# Altium PCB Toygether_PCB.PcbDoc (part 1 of 2)
Units mm, origin at the board's own origin, x right, y up, seen from the top; angles counter-clockwise.
Board outline 55 x 58.13 mm, 4 copper layers (Top Layer, Signal Layer 1, Signal Layer 2, Bottom Layer), stack 0.778 mm thick; 93 components, 74 nets, 341 pads, 140 vias.
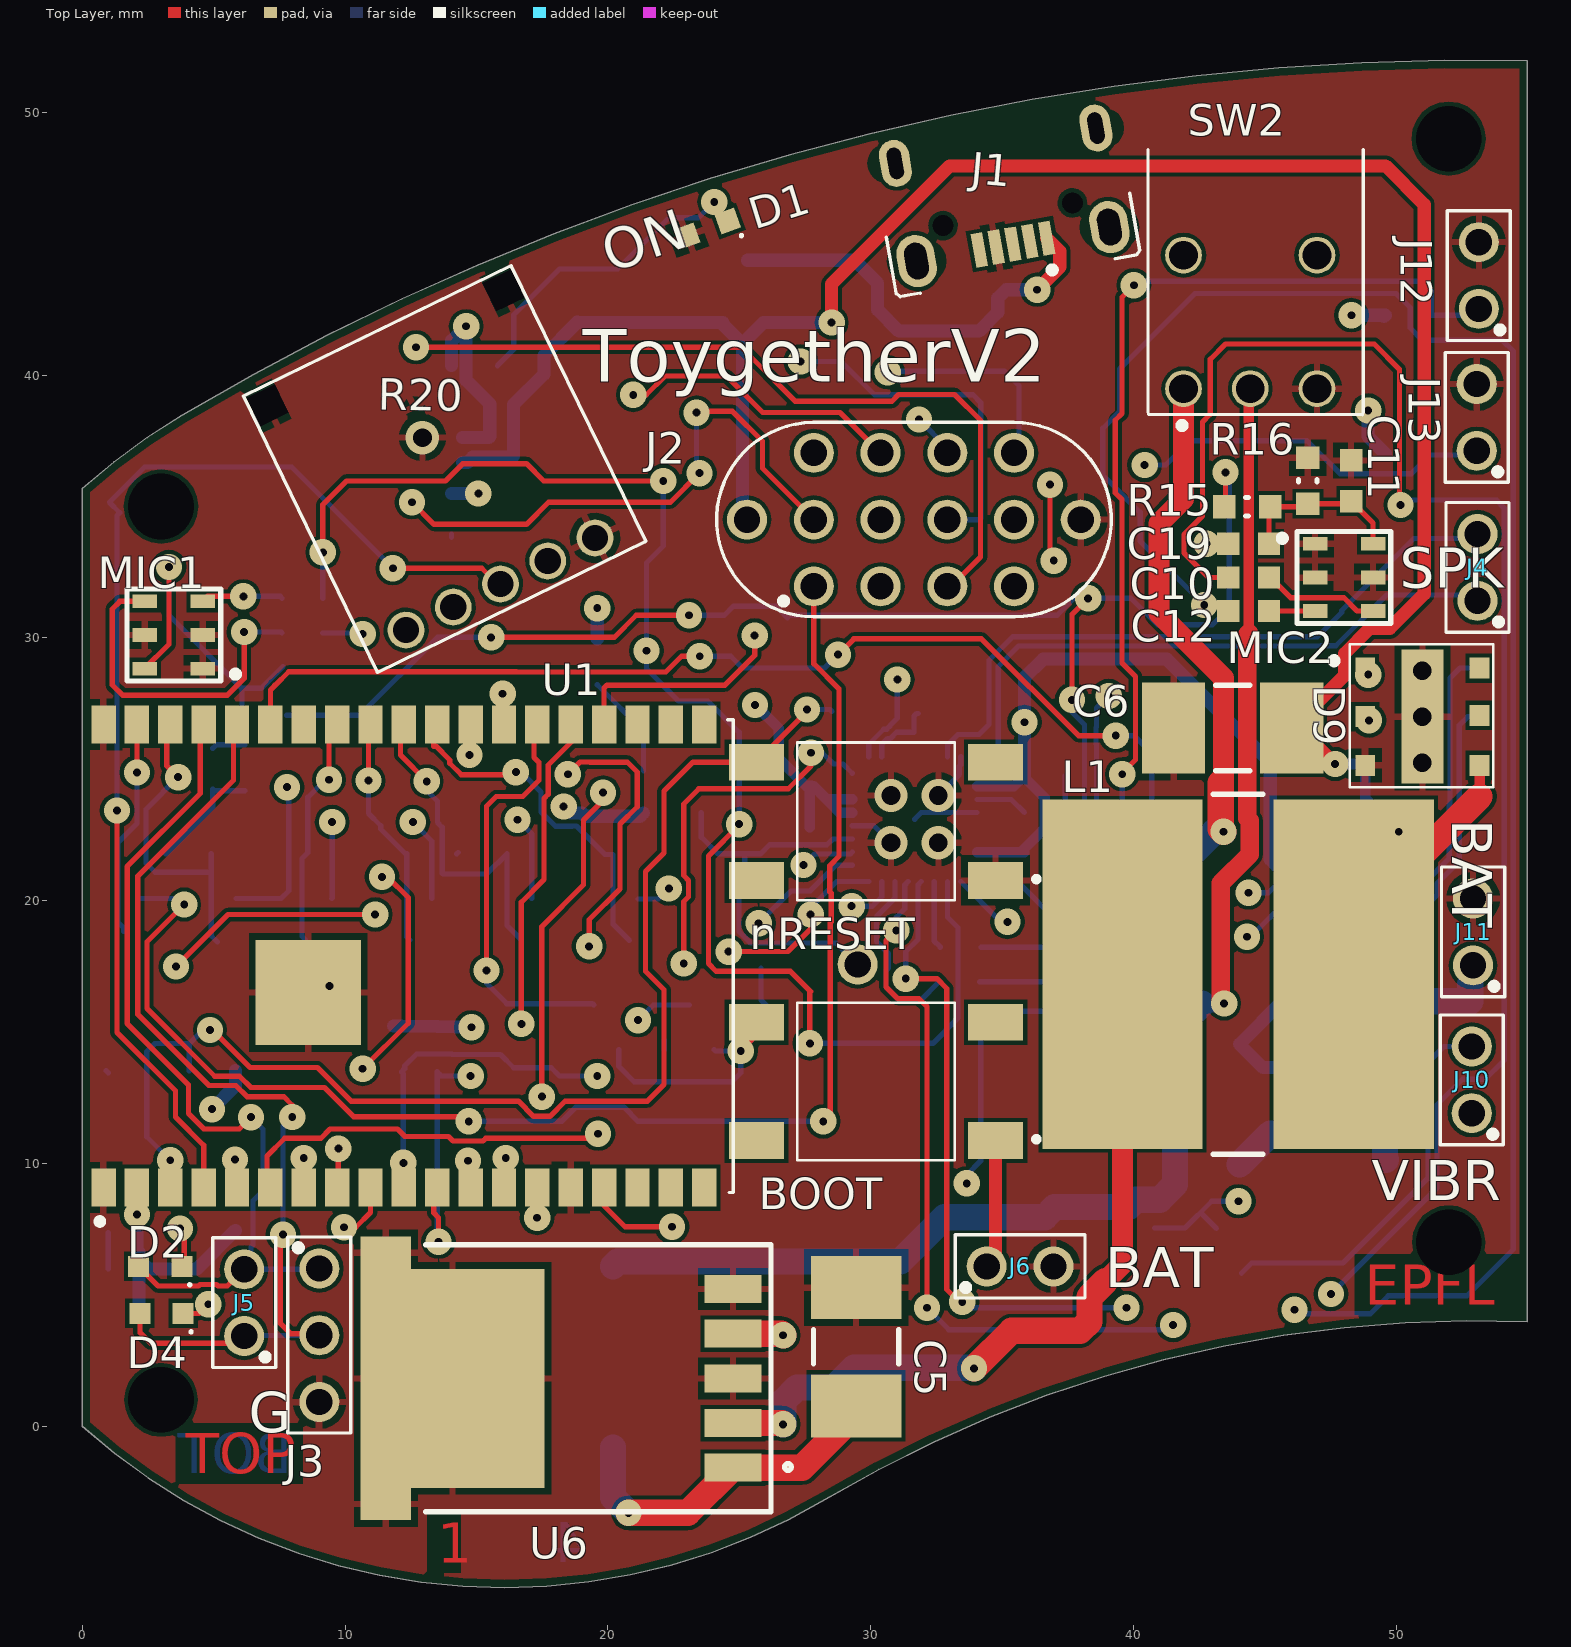
[diagram p0: Top Layer view]
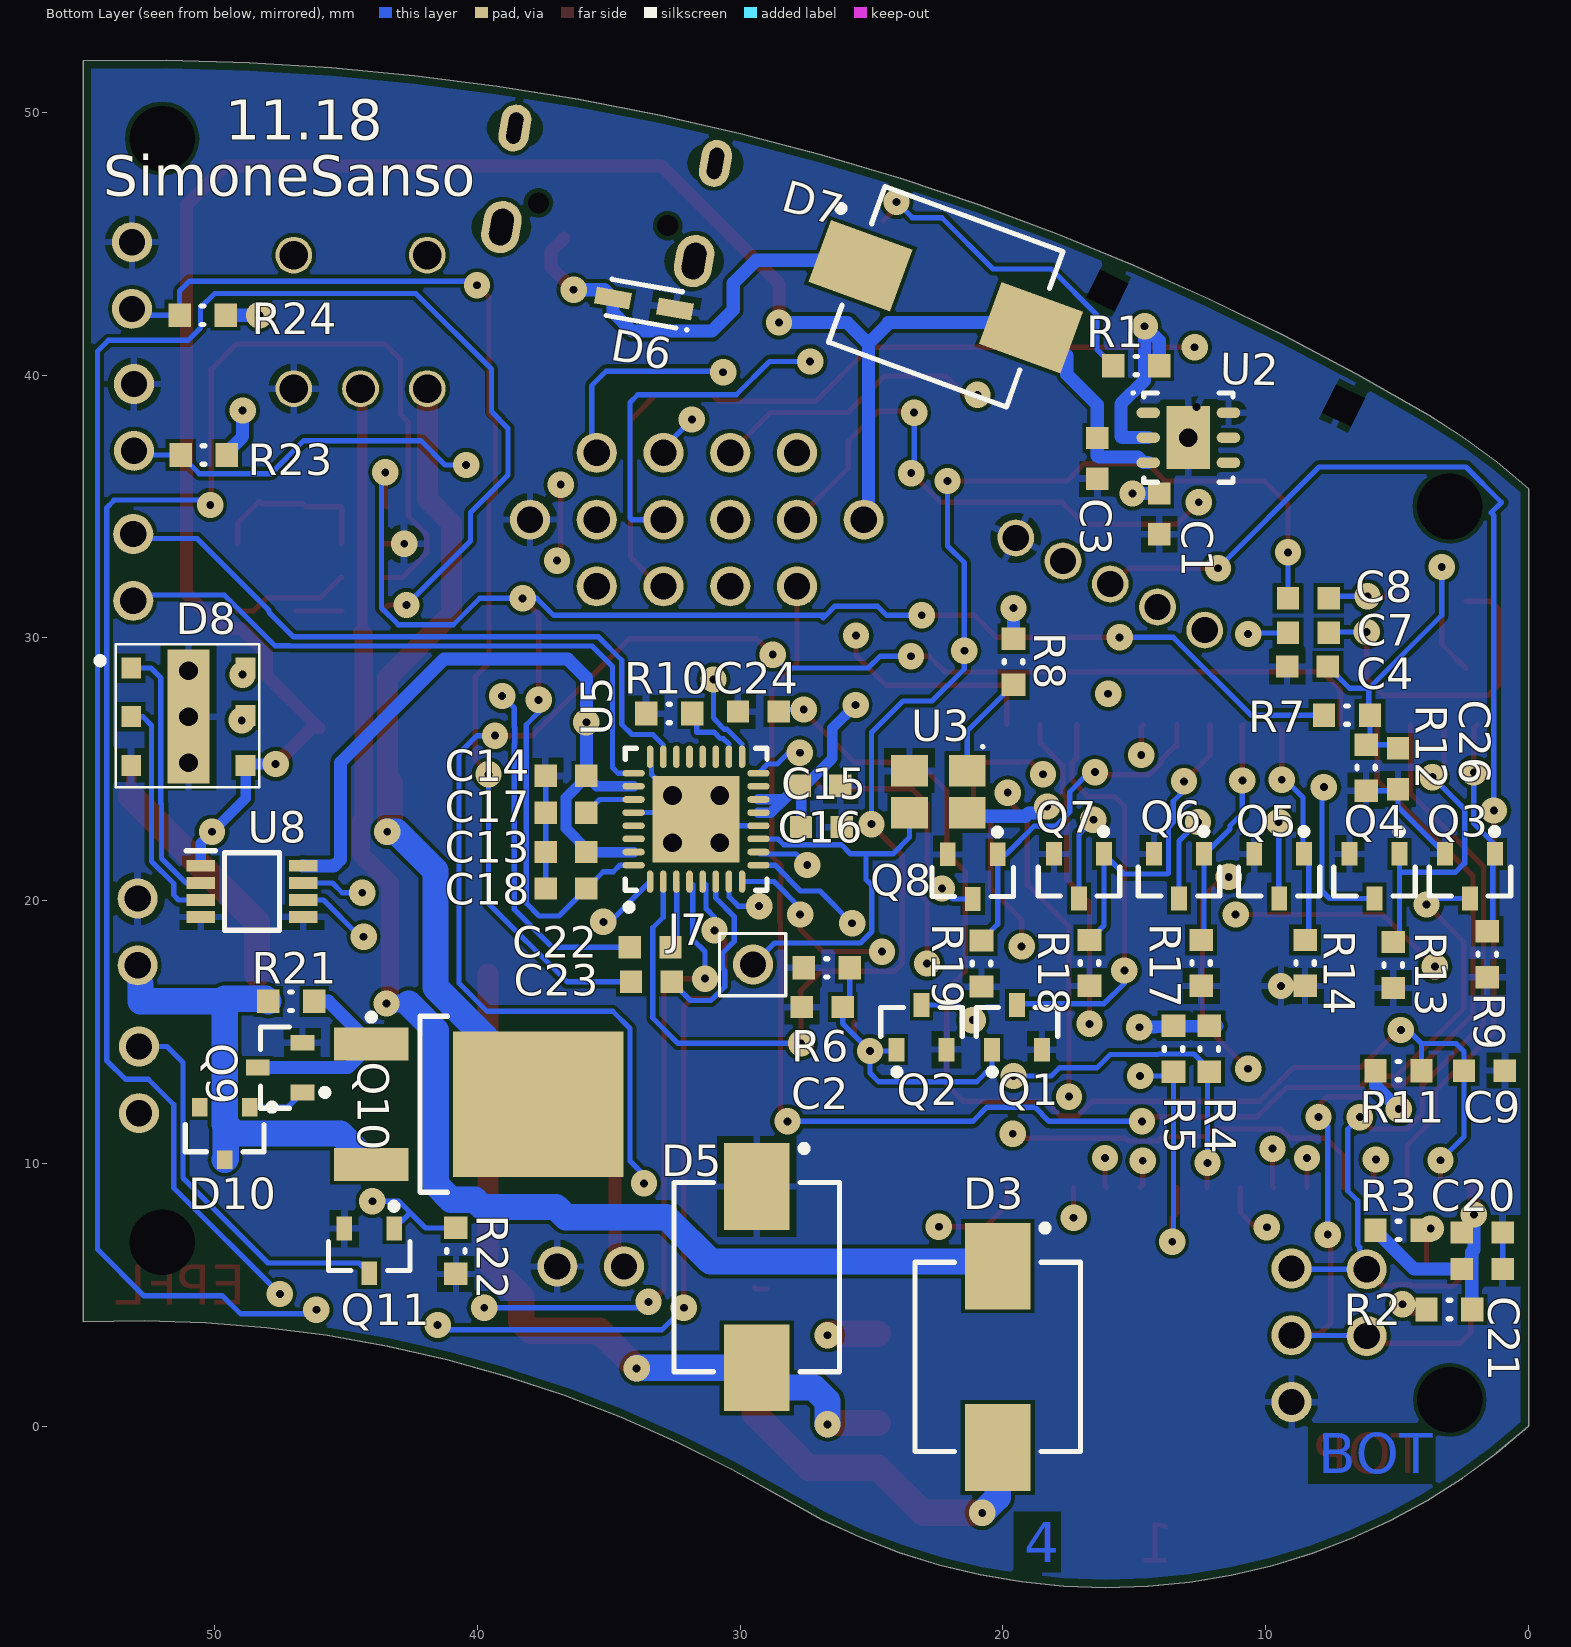
[diagram p1: Bottom Layer view, seen from below]
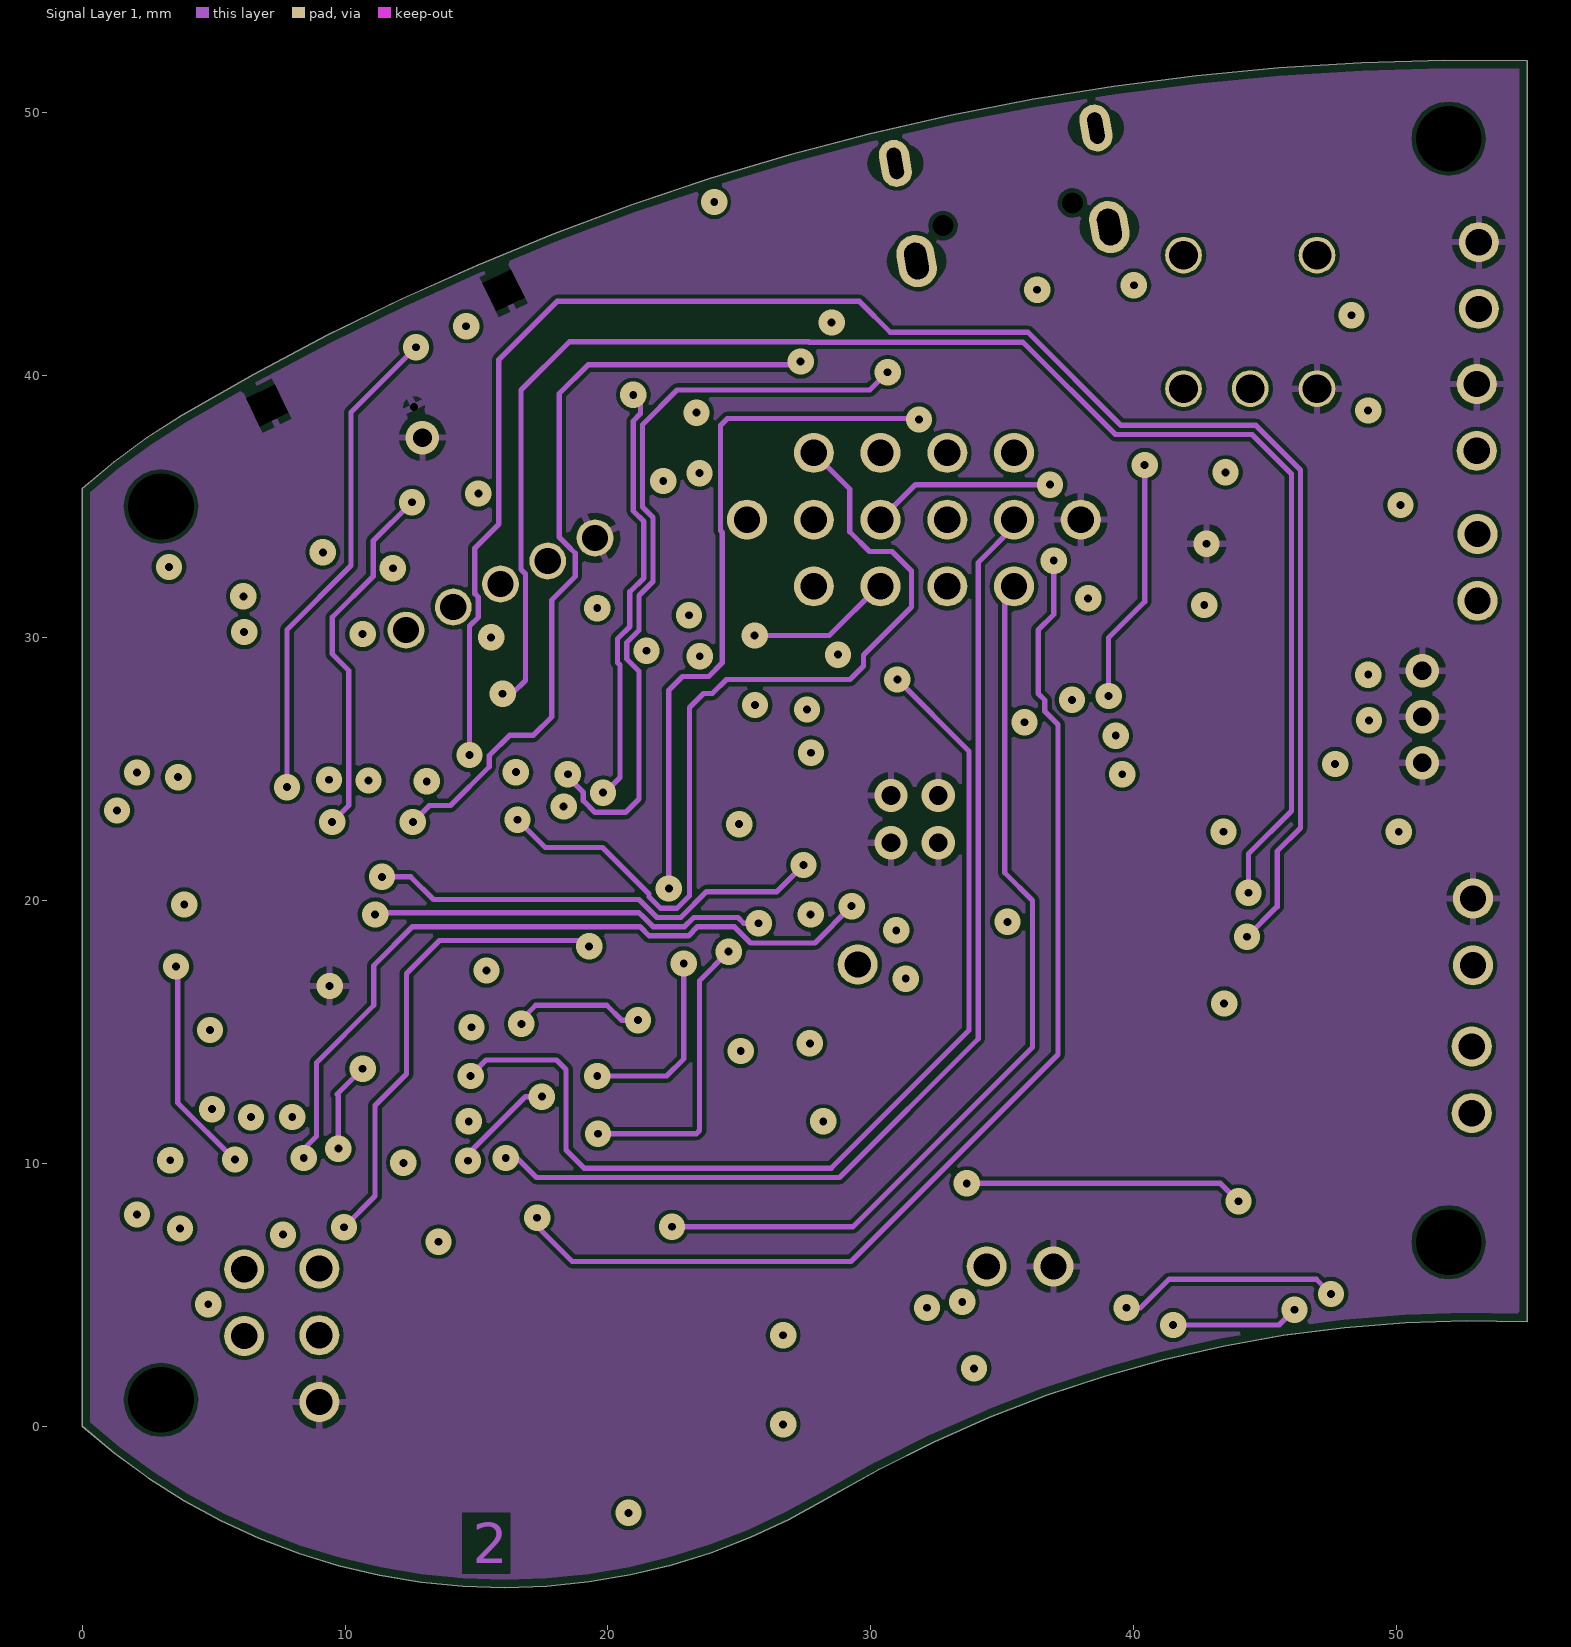
[diagram p2: Signal Layer 1]
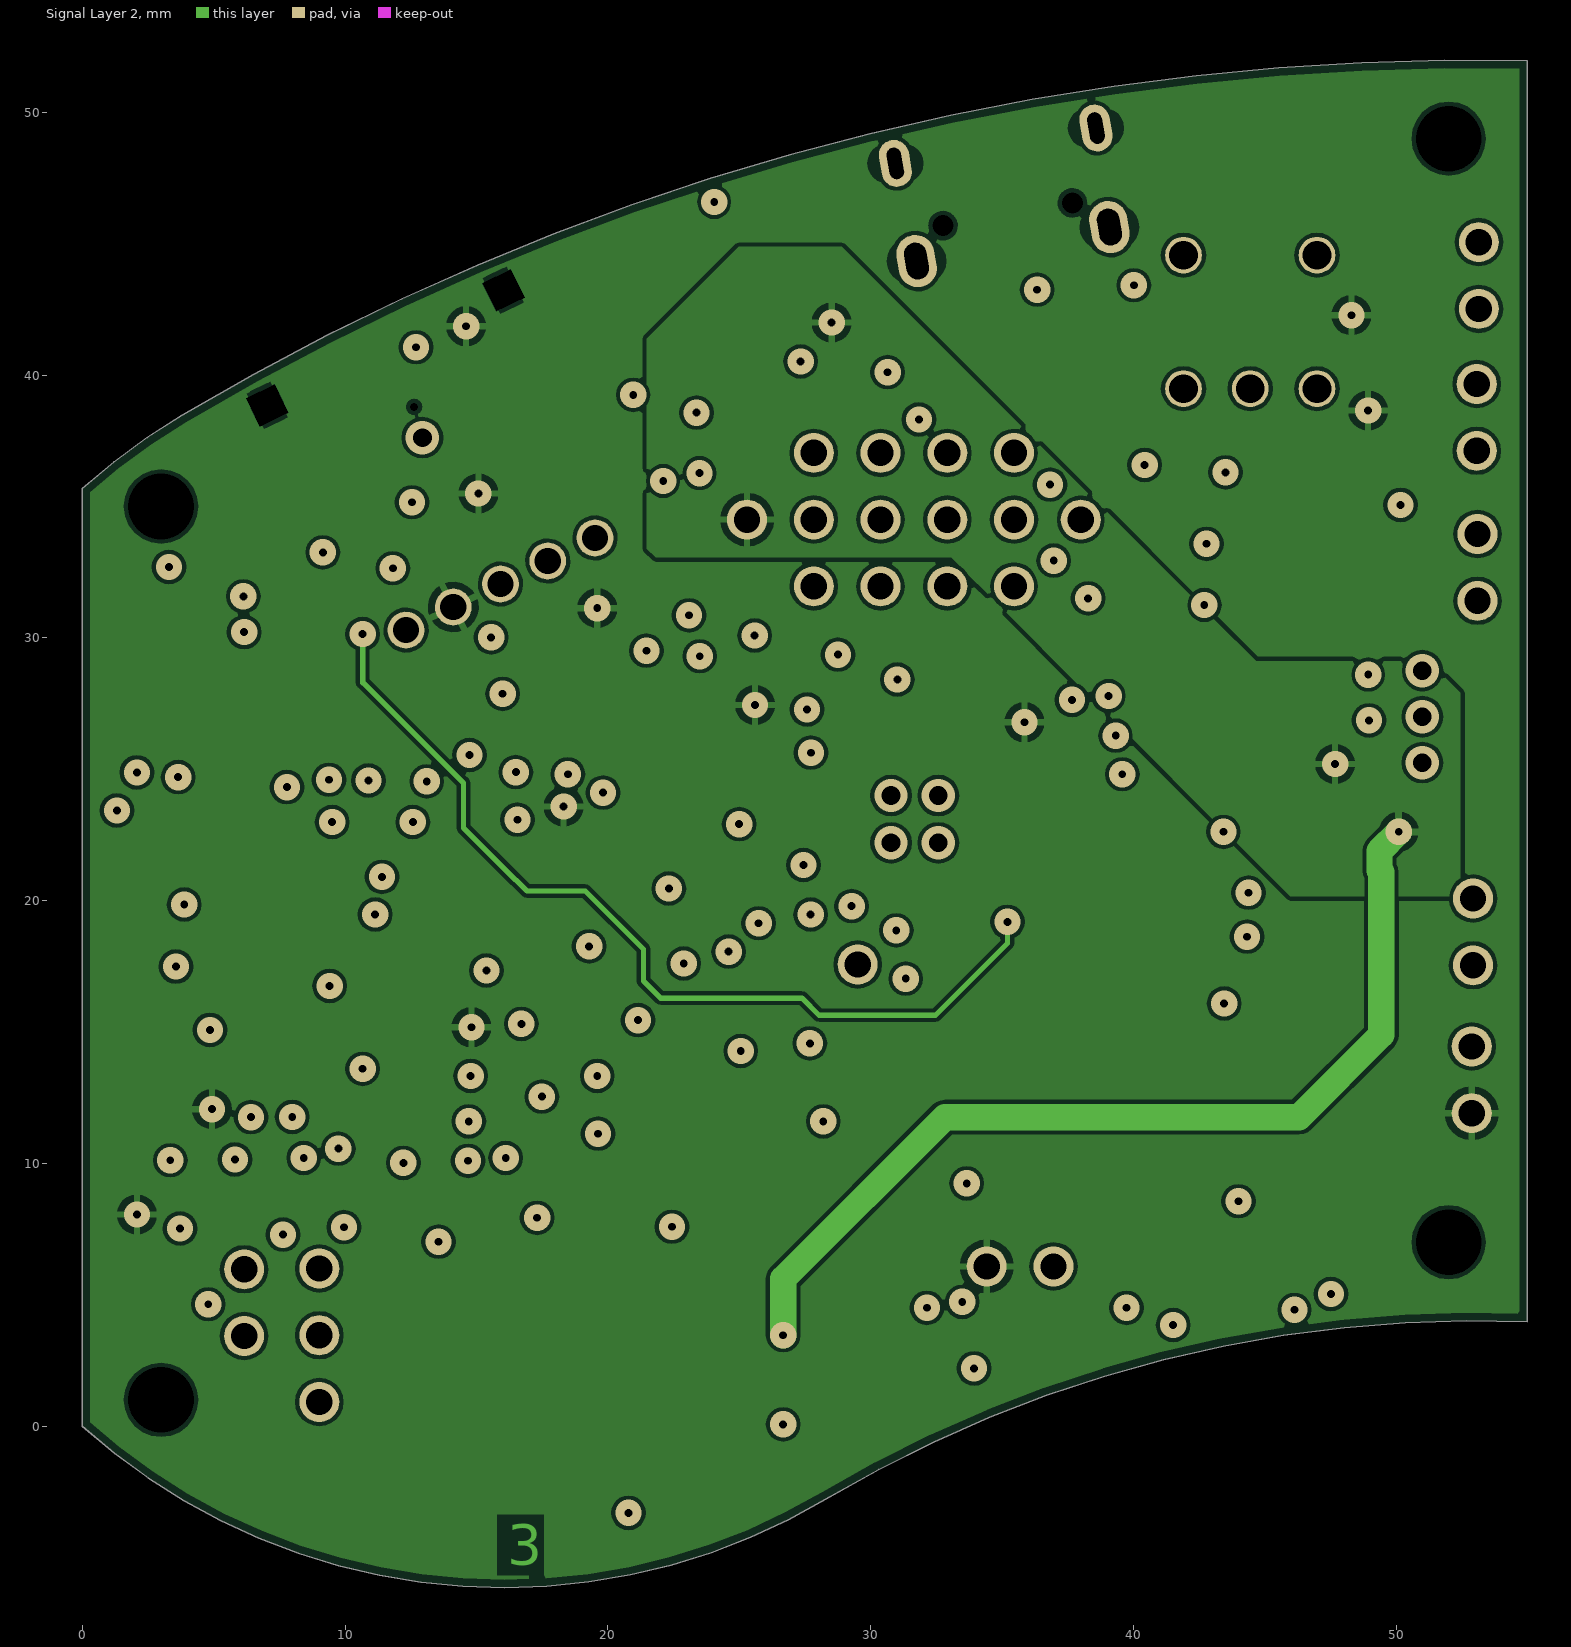
[diagram p3: Signal Layer 2]
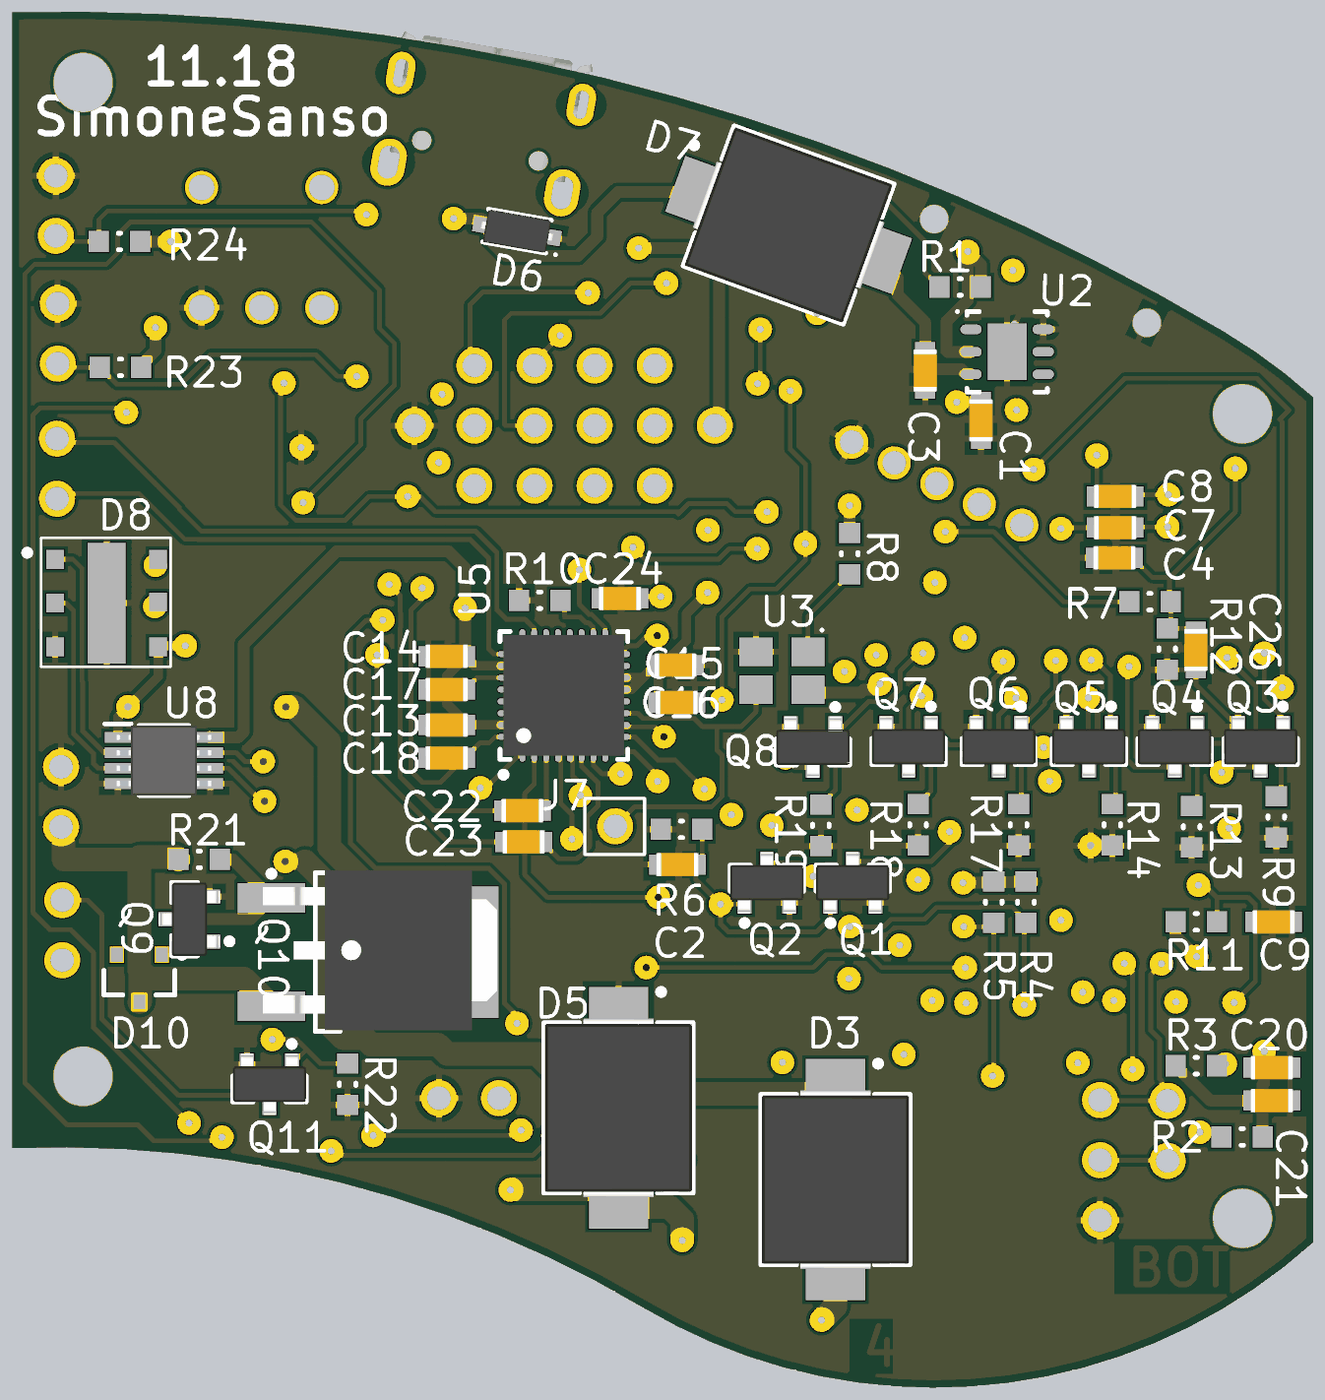
[diagram p5: 3D render of the assembled board from below, using the file's embedded part models]

## Layer stack, top to bottom
Top Solder: solder mask 0.0102, Solder Resist, Dk 3.5
Top Layer: signal copper 0.0356
Dielectric 1: core 0.254, FR-4, Dk 4.2
Signal Layer 1: signal copper 0.036
Dielectric 2: prepreg 0.127, Dk 4.2
Signal Layer 2: signal copper 0.036
Dielectric 4: core 0.254, Dk 4.2
Bottom Layer: signal copper 0.0356
Bottom Solder: solder mask 0.0102, Solder Resist, Dk 3.5

## Board outline
55,51.97 51.844,51.982 48.69,51.891 45.541,51.697 42.399,51.4 39.269,51.001 36.154,50.499 33.056,49.896 29.98,49.192 26.929,48.387 23.906,47.484 20.914,46.482 17.956,45.382 15.036,44.187 12.156,42.896 9.32,41.512 6.531,40.037 3.791,38.47 2.468,37.625 1.202,36.694 0,35.683 0,0 1.225,-1.03 2.517,-1.976 3.868,-2.833 5.274,-3.599 6.728,-4.269 8.223,-4.84 9.753,-5.311 11.311,-5.679 12.89,-5.941 14.483,-6.098 16.083,-6.149 17.682,-6.092 19.275,-5.93 20.853,-5.661 22.409,-5.287 23.937,-4.811 25.43,-4.234 26.882,-3.558 28.285,-2.788 30.315,-1.647 32.397,-0.606 34.527,0.334 36.699,1.171 38.91,1.903 41.152,2.528 43.423,3.045 45.715,3.452 48.024,3.748 50.345,3.934 52.672,4.008 55,3.97

## Design rules (kind name [scope] priority, off if disabled: settings)
BoardOutlineClearance [All] p1: gap=0.3 ignorepadtopadclearanceinfootprint=FALSE
Clearance Clearance_1 [All] p1: gap=0.15 ignorepadtopadclearanceinfootprint=TRUE
HoleSize [All] p1: absolutevalues=TRUE maxlimit=4 minlimit=0.3 maxpercent=80.000 minpercent=20.000
HoleToHoleClearance [All] p1: gap=0.35 allowstackedmicrovias=TRUE
MinimumAnnularRing [All] p1: minimumring=0.15
MinimumSolderMaskSliver [All] p1: minsoldermaskwidth=0.1
PlaneConnect [All] p1: planeconnectstyle=Relief reliefexpansion=0.3 reliefentries=4 reliefconductorwidth=0.2 reliefairgap=0.2
PolygonConnect [All] p1: connectstyle=Relief reliefconductorwidth=0.254 reliefentries=4 polygonreliefangle="90 Angle" airgapwidth=0.254
RoutingVias [All] p1: holewidth=0.5 width=1.2 viastyle="Through Hole" minholewidth=0.3 minwidth=1 maxholewidth=1.5 maxwidth=2.5
SilkToSilkClearance [All] p1 off: silktosilkclearance=0.15
SilkToSolderMaskClearance [IsPad] p1: minsilkscreentomaskgap=0.15 clearancetoexposedcopper=TRUE
SolderMaskExpansion [All] p1: expansion=0.05
Width [All] p1: maxlimit=2 minlimit=0.15 preferedwidth=0.2
24 further rules are at their usual default settings.

## Components (designator, comment, footprint, x,y, rotation, side; value= is the part's Value field where it differs from the comment)
BOOT "LL3301NF065QG" PUSH_BUTTON-LL3301NF065QG 30.21,13.12 r180 top (schematic designator SW1)
C1 "4.7uF(20%)" CAPC0603 14.05,34.72 r90 bottom
C2 "0.1uF(20%)" CAPC0603 26.878,15.951 r180 bottom
C3 "4.7uF(20%)" CAPC0603 16.41,36.83 r90 bottom
C4 "0.1uF(20%)" CAPC0603 8.41,28.91 r180 bottom
C5 "100uF(20%)" CAPC2312 29.45,3.02 r270 top
C6 "100uF(20%)" CAPC2312 43.78,26.57 r0 top
C7 "4.7uF(20%)" CAPC0603 8.38,30.19 r180 bottom
C8 "4.7uF(20%)" CAPC0603 8.38,31.51 r180 bottom
C9 "0.1uF(20%)" CAPC0603 1.68,13.53 r0 bottom
C10 "4.7uF(20%)" CAPC0603 44.39,32.3 r0 top
C11 "220pF(20%)" CAPC0603 48.29,35.98 r270 top
C12 "4.7uF(20%)" CAPC0603 44.39,31.02 r0 top
C13 "4.7uF(20%)" CAPC0603 36.63,21.85 r180 bottom
C14 "4.7uF(20%)" CAPC0603 36.63,24.75 r180 bottom
C15 "4.7uF(20%)" CAPC0603 26.964,24.376 r0 bottom
C16 "4.7uF(20%)" CAPC0603 26.91,22.8 r0 bottom
C17 "4.7uF(20%)" CAPC0603 36.63,23.35 r0 bottom
C18 "4.7uF(20%)" CAPC0603 36.63,20.46 r0 bottom
C19 "0.1uF(20%)" CAPC0603 44.39,33.58 r0 top
C20 "22uF(20%)" CAPC0603 1.76,7.37 r0 bottom
C21 "0.1uF(20%)" CAPC0603 1.76,5.98 r0 bottom
C22 "4.7uF(20%)" CAPC0603 33.43,18.23 r180 bottom
C23 "4.7uF(20%)" CAPC0603 33.38,16.911 r180 bottom
C24 "0.1uF(20%)" CAPC0603 29.31,27.2 r180 bottom
C26 "220pF(20%)" CAPC0603 4.965,25.02 r90 bottom
D1 "SML-D12U1WT86" SML-D12U1WT86 23.79,45.58 r200 top
D2 "SML-D12Y1WT86" SML-D12U1WT86 2.965,6.08 r180 top
D3 "B340CE-13" SCH_DIODE-B3xxCE 20.2,2.64 r270 bottom
D4 "SML-D12D1W" SML-D12U1WT86 3.017,4.29 r180 top
D5 "B340CE-13" SCH_DIODE-B3xxCE 29.37,5.67 r270 bottom
D6 "CDSOD323" SOD-323-SCHOTTKY_DIODE-30V/0.5A 33.66,42.72 r10 bottom
D7 "B340CE-13" SCH_DIODE-B3xxCE 22.18,42.98 r200 bottom
D8 "APA102C-5050" APA102C-5050 51,27 r180 bottom
D9 "APA102C-5050" APA102C-5050 51,27 r0 top
D10 "BZX84-A6V8,215" ZEN_DIODE-SOT23 49.62,11.14 r270 bottom
J1 "710-629105150521" USB-MICRO-TYPE-B-FEM 35.42,44.987 r190 top
J2 "EXT_CON" EXT_CON_14P 25.3,34.5 r0 top
J3 "CON_3P" CON_3P 9.02,5.99 r270 top
J4 "CON_2P" CON_2P 53.1,31.41 r90 top
J5 "CON_2P" CON_2P 6.16,3.43 r90 top
J6 "CON_2P" CON_2P 34.42,6.08 r0 top
J7 "PIN_TESTPOINT" PIN_TESTPOINT 29.51,17.57 r180 bottom
J10 "CON_2P" CON_2P 52.88,11.91 r90 top
J11 "CON_2P" CON_2P 52.93,17.54 r90 top
J12 "CON_2P" CON_2P 53.15,42.52 r90 top
J13 "CON_2P" CON_2P 53.07,37.12 r90 top
L1 "100uH(10%)" IND1307-100uH 43.99,17.2 r0 top
MIC1 "ICS40619" MIC-ICS40619 3.48,30.11 r180 top
MIC2 "ICS40619" MIC-ICS40619 48.02,32.3 r0 top
nRESET "LL3301NF065QG" PUSH_BUTTON-LL3301NF065QG 30.21,23.02 r180 top (schematic designator SW3)
Q1 "RUC002N05HZGT116" MOS-N_RUC002N05 19.47,15.18 r90 bottom
Q2 "RUC002N05HZGT116" MOS-N_RUC002N05 23.1,15.18 r90 bottom
Q3 "RUC002N05HZGT116" MOS-N_RUC002N05 2.23,20.93 r270 bottom
Q4 "RUC002N05HZGT116" MOS-N_RUC002N05 5.86,20.93 r270 bottom
Q5 "RUC002N05HZGT116" MOS-N_RUC002N05 9.49,20.93 r270 bottom
Q6 "RUC002N05HZGT116" MOS-N_RUC002N05 13.3,20.93 r270 bottom
Q7 "RUC002N05HZGT116" MOS-N_RUC002N05 17.11,20.93 r270 bottom
Q8 "RUC002N05HZGT116" MOS-N_RUC002N05 21.15,20.91 r270 bottom
Q9 "RUC002N05HZGT116" MOS-N_RUC002N05 47.51,13.645 r0 bottom
Q10 "FDD4685-F085P" MOS-P_FDD4685 39.99,12.25 r180 bottom
Q11 "RUC002N05HZGT116" MOS-N_RUC002N05 44.12,6.67 r270 bottom
R1 "300R(5%)" RC0603 14.93,40.36 r180 bottom
R2 "300R(5%)" RC0603 3.01,4.44 r180 bottom
R3 "300R(5%)" RC0603 4.95,7.45 r0 bottom
R4 "10K(5%)" RC0603 12.15,14.36 r270 bottom
R5 "10K(5%)" RC0603 13.51,14.36 r270 bottom
R6 "10K(5%)" RC0603 26.709,17.44 r180 bottom
R7 "680R(5%)" RC0603 6.91,27.06 r0 bottom
R8 "10K(5%)" RC0603 19.6,29.09 r270 bottom
R9 "10K(5%)" RC0603 1.57,17.96 r90 bottom
R10 "10K(5%)" RC0603 32.7,27.12 r180 bottom
R11 "10K(5%)" RC0603 4.95,13.53 r0 bottom
R12 "47K(5%)" RC0603 6.18,25.06 r90 bottom
R13 "10K(5%)" RC0603 5.15,17.55 r90 bottom
R14 "10K(5%)" RC0603 8.5,17.63 r90 bottom
R15 "680R(5%)" RC0603 44.33,34.99 r180 top
R16 "47K(5%)" RC0603 46.64,35.98 r270 top
R17 "10K(5%)" RC0603 12.46,17.63 r90 bottom
R18 "10K(5%)" RC0603 16.71,17.63 r90 bottom
R19 "10K(5%)" RC0603 20.82,17.61 r90 bottom
R20 "10K" POT-RK10J12E0A0A 15.918,32.049 r26 top
R21 "10M(5%)" RC0603 47.09,16.17 r0 bottom
R22 "10K(5%)" RC0603 40.82,6.67 r90 bottom
R23 "10K(5%)" RC0603 50.42,36.96 r180 bottom
R24 "10K(5%)" RC0603 50.46,42.28 r180 bottom
SW2 "200MSP1T1B2M6QE" "SPDT- 200MSP1T1B2M6QE" 44.45,39.483 r0 top locked
U1 "ESP-WROVER-IB" ESP32-WROVER-I 9.07,17.89 r90 top
U2 "ST1L05APU33R" LDO-ST1L05 12.945,37.62 r180 bottom
U3 "OSC_24MHz" OSC_24MHz 22.46,24.14 r0 bottom
U5 "WM8978_CODEC" WM8978_CODEC 31.68,23.1 r90 bottom
U6 "LM2576SX-5.0" LM2576SX-STEP_DOWN-5.0 12.307,1.82 r0 top
U8 "SN74LVC2T45DCTRE4" VOLTAGE_TRANSLATOR_3.3-5V 48.58,20.35 r180 bottom

## Footprints (in the part's own frame and the unit in brackets; to place one, negate y for a bottom-side part, rotate by r counter-clockwise, add the part's x,y. Pads: shape width x height; smd on the part's side, far side on the other; paste and mask are expansions set on the pad)
APA102C-5050 [mm]
  rect 0.75x0.8 smd: 1(-2.175,1.85) 2(-2.175,0) 3(-2.175,-1.85) 4(2.175,-1.85) 5(2.175,0.05) 6(2.175,1.85)
  rect 1.6x5.1 smd: 3(0,0)
  silkscreen extent -3.49,-2.69 2.7,2.76
CAPC0603 [mm] "Chip Capacitor, 2-Leads, Body 1,60x0,80mm, IPC Medium Density"
  rect 0.85x0.85 smd: 1(-0.775,0) 2(0.775,0)
  body extent -0.9,-0.5 0.9,0.5, height 1
CAPC2312 [mm] "Chip Capacitor, 2-Leads, Body 6.00x3.25mm, IPC Medium Density"
  rect 2.4x3.45 smd: 1(-2.25,0) 2(2.25,0)
  silkscreen extent -0.65,-1.63 0.65,1.63, body extent -3.1,-1.7 3.1,1.7, height 2
CON_2P [mil]
  round 60 hole 39.37: 1(0,0) 2(100,0)
  silkscreen extent -47,-47 147,47
CON_3P [mm]
  round 1.524 hole 1: 1(-0.01,0) 2(2.53,0) 3(5.07,0)
  silkscreen extent -1.21,-1.2 6.25,1.2
ESP32-WROVER-I [mm] "SMD, 38-Leads, Body 18x25.5mm, Pitch 1.27mm"
  rect 1.45x0.93 smd: 1(-8.81,8.26) 2(-8.81,6.99) 3(-8.81,5.72) 4(-8.81,4.45) 5(-8.81,3.18) 6(-8.81,1.91) 7(-8.81,0.64) 8(-8.81,-0.63) 9(-8.81,-1.9) 10(-8.81,-3.17) 11(-8.81,-4.44) 12(-8.81,-5.71) 13(-8.81,-6.98) 14(-8.81,-8.25) 15(-8.81,-9.52) 16(-8.81,-10.79) 17(-8.81,-12.06) 18(-8.81,-13.33) 19(-8.81,-14.6) 20(8.81,-14.6) 21(8.81,-13.33) 22(8.81,-12.06) 23(8.81,-10.79) 24(8.81,-9.52) 25(8.81,-8.25) 26(8.81,-6.98) 27(8.81,-5.71) 28(8.81,-4.44) 29(8.81,-3.17) 30(8.81,-1.9) 31(8.81,-0.63) 32(8.81,0.64) 33(8.81,1.91) 34(8.81,3.18) 35(8.81,4.45) 36(8.81,5.72) 37(8.81,6.99) 38(8.81,8.26)
  rect 4x4 smd: 39(-1.38,0.47)
  silkscreen extent -10.22,-15.7 9,8.52
EXT_CON_14P [mil]
  round 60 hole 39.37: 1(100,-100) 2(200,-100) 3(300,-100) 4(400,-100) 5(100,0) 6(200,0) 7(300,0) 8(400,0) 9(100,100) 10(200,100) 11(300,100) 12(400,100) 13(0,0) 14(500,0)
  silkscreen extent -46,-146 546,146
IND1307-100uH [mm] "Precision Wire Wound Inductor, 2-Leads, Body 13.00x13.00mm, IPC Medium Density"
  rect 6.1x13.3 smd: 1(-4.4,0) 2(4.4,0)
  silkscreen extent -0.95,-6.85 0.95,6.85, body extent -6.6,-6.5 6.6,6.5, height 7.4
LDO-ST1L05 [mm] "SON, 6-Leads, Body 3x3mm, Pitch 0.95mm, Thermal Pad 2.4x1.65mm, IPC Low Density"
  oval 0.9x0.4 smd: 1(-1.525,0.95) 2(-1.525,0) 3(-1.525,-0.95) 4(1.525,-0.95) 5(1.525,0) 6(1.525,0.95)
  rect 1.65x2.4 smd: 7(0,0)
  silkscreen extent -2.15,-1.7 1.7,1.75, body extent -1.55,-1.55 1.55,1.55, height 0.95
LM2576SX-STEP_DOWN-5.0 [mm]
  rect 2.16x1.07 smd: 1(12.461,-3.4) 2(12.461,-1.7) 3(12.461,0) 4(12.461,1.7) 5(12.461,3.4)
  rect 1.91x1.235 smd: 6(-0.754,-4.782) 6(-0.754,4.782)
  rect 6.99x8.33 smd: 6(1.786,0)
  silkscreen extent 0.76,-5.08 14.68,5.08
MIC-ICS40619 [mm] "SOTFL, 6-Leads, Body 3.50x3.14mm, Pitch 1.28mm, IPC Medium Density"
  rect 0.932x0.522 smd: 1(-1.105,1.28) 2(-1.105,0) 3(-1.105,-1.28) 4(1.105,-1.28) 5(1.105,0) 6(1.105,1.28)
  silkscreen extent -2.48,-1.75 1.78,1.75, body extent -1.32,-1.75 1.33,1.75, height 0.99
MOS-N_RUC002N05 [mm] "SOT23, 3-Leads, Body 2.90x2.40mm, Pitch 0.95mm, IPC Medium Density"
  rect 0.9x0.6 smd: 1(-0.85,0.95) 2(-0.85,-0.95) 3(0.85,0)
  silkscreen extent -1.82,-1.55 0.75,1.55, body extent -1.3,-1.55 1.3,1.55, height 1.2
MOS-P_FDD4685 [mm] "DPAK, 3-Leads, Body 6.75x6.22mm, Pitch 2.29mm, IPC High Density"
  rect 2.85x1.25 smd: 1(-4.05,2.29) 2(-4.05,-2.29)
  rect 6.5x5.55 smd: 3(2.3,0)
  silkscreen extent -4.18,-3.35 -1.15,3.44, body extent -4.41,-3.3 5.5,3.45, height 2.39
OSC_24MHz [mm] "ECS-3225MV SMD Multi Volt Crystal Oscillator"
  rect 1.4x1.2 smd: 1(-1.1,-0.8) 2(1.1,-0.8) 3(1.1,0.8) 4(-1.1,0.8)
  silkscreen extent -1.74,-1.77 -1.64,-1.67, body extent -1.65,-1.3 1.65,1.3, height 1.2
PIN_TESTPOINT [mil]
  round 60 hole 39.37: 1(0,0)
  silkscreen extent -50,-47 49,46
POT-RK10J12E0A0A [mm]
  rect 0x0 hole 1.2 square: 1(-5,10) 1(5,10)
  round 0 hole 0.3: 1(0,7.5)
  round 1.4 hole 1: 1(4,0) 2(0,0) 3(-2,0) 4(2,0) 5(-4,0)
  silkscreen extent -5.69,-0.97 5.68,10.72
PUSH_BUTTON-LL3301NF065QG [mm]
  rect 2.1x1.4 smd: 1(-4.55,2.25) 2(4.55,2.25) 3(-4.55,-2.25) 4(4.55,-2.25)
  silkscreen extent -6.2,-3 3,3, body extent -4.5,-3 4.5,3, height 4.3
RC0603 [mm] "Chip Resistor, 2-Leads, Body 1.60x0.80mm, IPC Medium Density"
  rect 0.85x0.9 smd: 1(-0.875,0) 2(0.875,0)
  silkscreen extent -0.05,-0.35 0.05,0.35, body extent -0.75,-0.45 0.75,0.45, height 0.55
SCH_DIODE-B3xxCE [mm] "Molded Diode, 2-Leads, Body 6.86x5.91mm, IPC Medium Density"
  rect 3.3x2.5 smd: 1(-3.45,0) 2(3.45,0)
  silkscreen extent -5.02,-3.15 3.6,3.15, body extent -3.77,-3.11 3.77,3.11, height 2.5
SML-D12U1WT86 [mm] "Molded Diode, 2-Leads, Body 1,60x0,80mm, IPC Medium Density"
  rect 0.8x0.8 smd: 1(-0.825,0) 2(0.825,0)
  silkscreen extent -1.17,0.65 -1.08,0.75, body extent -1.07,-0.45 1.07,0.45, height 0.65
SOD-323-SCHOTTKY_DIODE-30V/0.5A [mm] "Molded Diode, 2-Leads, Body 2,50x1,30mm, IPC Medium Density"
  rect 1.35x0.65 smd: 1(-1.2,0) 2(1.2,0)
  silkscreen extent -1.82,-0.7 1.35,0.75, body extent -1.57,-0.7 1.57,0.7, height 1.1
"SPDT- 200MSP1T1B2M6QE" [mm]
  round 1.4 hole 1.09: 1(-2.54,0) 2(0,0) 3(2.54,0) 4(-2.54,5.08) 5(2.54,5.08)
  silkscreen extent -3.89,-1.52 4.3,9.1
USB-MICRO-TYPE-B-FEM [mm]
  rect 0.45x1.3 smd: 1(-1.3,0) 2(-0.65,0) 3(0,0) 4(0.65,0) 5(1.3,0)
  oval 1.15x1.8 hole 1.2 slot 0.55 at 0 deg: ""(-3.875,-3.8) ""(3.875,-3.8)
  oval 1.45x2 hole 1.4 slot 0.85 at 0 deg: ""(-3.725,0) ""(3.725,0)
  round 0 hole 0.8: ""(-2.5,-1.15) ""(2.5,-1.15)
  silkscreen extent -4.71,-1.13 4.7,1.35, body extent -4.1,-5.55 4.1,-0.15, height 2.67
VOLTAGE_TRANSLATOR_3.3-5V [mm] "TSSOP, 8-Leads, Body 2,00x2,30mm, Pitch 0,50mm, IPC Medium Density"
  rect 1.1x0.45 smd: 1(-1.95,0.975) 2(-1.95,0.325) 3(-1.95,-0.325) 4(-1.95,-0.975) 5(1.95,-0.975) 6(1.95,-0.325) 7(1.95,0.325) 8(1.95,0.975)
  silkscreen extent -2.5,-1.48 1.05,1.55, body extent -2,-1.47 2,1.48, height 1.3
WM8978_CODEC [mm] "QFN, 32-Leads, Body 5.00x5.00mm, Pitch 0.50mm, Thermal Pad 3.30x3.30mm, IPC Medium Density"
  oval 0.85x0.25 smd: 1(-2.375,1.75) 2(-2.375,1.25) 3(-2.375,0.75) 4(-2.375,0.25) 5(-2.375,-0.25) 6(-2.375,-0.75) 7(-2.375,-1.25) 8(-2.375,-1.75) 17(2.375,-1.75) 18(2.375,-1.25) 19(2.375,-0.75) 20(2.375,-0.25) 21(2.375,0.25) 22(2.375,0.75) 23(2.375,1.25) 24(2.375,1.75)
  oval 0.25x0.85 smd: 9(-1.75,-2.375) 10(-1.25,-2.375) 11(-0.75,-2.375) 12(-0.25,-2.375) 13(0.25,-2.375) 14(0.75,-2.375) 15(1.25,-2.375) 16(1.75,-2.375) 25(1.75,2.375) 26(1.25,2.375) 27(0.75,2.375) 28(0.25,2.375) 29(-0.25,2.375) 30(-0.75,2.375) 31(-1.25,2.375) 32(-1.75,2.375)
  rect 3.3x3.3 smd: 33(0,0)
  silkscreen extent -3.47,-2.7 2.7,2.7, body extent -2.55,-2.55 2.55,2.55, height 1
ZEN_DIODE-SOT23 [mm] "SOT23, 3-Leads, Body 3x1.4mm, Pitch 0.95mm"
  rect 0.7x0.6 smd paste-0.05: 1(-1,0.95) 2(-1,-0.95) 3(1,0)
  silkscreen extent -1.12,-1.5 0.7,1.92, body extent -0.7,-1.5 0.7,1.5, height 1.1

## Part data
BOOT nRESET: library part SPST_SW, Supplier Part Number 1=612-LL3301NF065QG, Supplier 1=Mouser
C1 C3 C7 C8 C10 C12 C13 C14 C15 C16 C17 C18 C22 C23: library part CAP-4.7uF(20%), "C1608JB1V475M080AC", Supplier Part Number 1=810-C1608JB1V475M08C, Supplier 1=Mouser
C2 C4 C9 C19 C21 C24: library part CAP-0.1uF(20%), "C1608X8R1E104M080AA", Supplier Part Number 1=810-C1608X8R1E104M0A, Supplier 1=Mouser
C5 C6: library part CAP-100uF(20%), "GRM31CR61A107ME05L", Supplier Part Number 1=581-TPSF107M016R0200, Supplier 1=Mouser
C11 C26: library part CAP-220pF(20%), "C1608CH2A221J080AA", Supplier Part Number 1=810-C1608CH2A221J08A, Supplier 1=Mouser
C20: library part CAP-22uF(20%), "F380J226MMAAH1", Supplier Part Number 1=581-F380J226MMAAH1, Supplier 1=Mouser
D1: library part RED_LED, "SML-D12U1WT86-2.2V-20mA", Supplier Part Number 1=755-SML-D12U1WT86, Supplier 1=Mouser
D2: library part YELLOW_LED, "SML-D12Y1WT86_YELLOW-LED", Supplier Part Number 1=755-SML-D12Y1WT86, Supplier 1=Mouser
D3 D5 D7: library part SCH_DIODE, Supplier Part Number 1=621-B340CE-13, Supplier 1=Mouser
D4: library part ORANGE_LED, "SML-D12D1WT86_ORANGE-LED", Supplier Part Number 1=755-SML-D12D1WT86, Supplier 1=Mouser
D6: library part BIDIRECTIONAL_DIODE, "CDSOD323-T05LC - ESD Suppressors / TVS Diodes Bidirectional Ultra Low Cap", Supplier Part Number 1=652-CDSOD323-T05LC, Supplier 1=Mouser
D8 D9: library part APA102C, Supplier Part Number 1=474-COM-14863, Supplier 1=Mouser
D10: library part ZEN_DIODE-6.15V, Supplier Part Number 1=771-BZX84-A6V8,215, Supplier 1=Mouser
J1: library part USB-MICRO-TYPE-B_CON_6P, "USB Micro SMT Type B Horizontal", Supplier 1=Mouser, Supplier Part Number 1=710-629105150521
J2: "External connector to the LEDs and capacitive touch sensors (on the plush toy)"
J3: "3 Positions Header, Breakaway Connector 0.100\" (2.54mm) Through Hole Tin"
J4 J5 J6 J10 J11 J12 J13: "2 Positions Header, Breakaway Connector 0.100\" (2.54mm) Through Hole Tin"
J7: "1 Position Header, Breakaway Connector 0.100\" (2.54mm) Through Hole Tin"
L1: library part IND-100uH(10%), "SDR1307A-101K", Supplier Part Number 1=652-SDR1307A-101K, Supplier 1=Mouser
MIC1 MIC2: library part MIC-ICS40619, "Differential analog top-port microphone", Supplier Part Number 1=410-ICS-40619, Supplier 1=Mouser
Q1 Q2 Q3 Q4 Q5 Q6 Q7 Q8 Q9 Q11: library part MOSFET_N-CH_RUC002N05HZGT116, "RUC002N05HZGT116 (N-CH/50V/2.2R/200mA)", Supplier Part Number 1=755-RUC002N05HZGT116, Supplier 1=Mouser
Q10: library part MOSFET_P-CH_FDD4685-F085P, "FDD4685-F085P(P-CH/40V/35mR/32A)", Supplier Part Number 1=512-FDD4685_F085P, Supplier 1=Mouser
R1 R2 R3: library part RES-300R(5%), "RC0603JR-07300RL", Supplier Part Number 1=603-RC0603JR-07300RL, Supplier 1=Mouser
R4 R5 R6 R8 R9 R10 R11 R13 R14 R17 R18 R19 R22 R23 R24: library part RES-10K(5%), "RC0603JR-0710KL", Supplier Part Number 1=603-RC0603JR-0710KL, Supplier 1=Mouser
R7 R15: library part RES-680R(5%), "RC0603JR-07680RL", Supplier Part Number 1=603-RC0603JR-07680RL, Supplier 1=Mouser
R12 R16: library part RES-47K(5%), "RC0603JR-0747KL", Supplier Part Number 1=603-RC0603JR-0747KL, Supplier 1=Mouser
R20: library part POT-10K, "RK10J12E0A0A", Supplier Part Number 1=688-RK10J12E0A0A, Supplier 1=Mouser
R21: library part RES-10M(5%), "CRCW060310M0DHEAP", Supplier Part Number 1=71-CRCW060310M0DHEAP, Supplier 1=Mouser
SW2: library part SPDT_SW, Supplier Part Number 1=612-200MSP1T1B2M6QE, Supplier 1=Mouser
U1: Supplier Part Number 1=356-ESP32WROIB(16MB), Supplier 1=Mouser
U2: library part LDO-3.3, "Low drop linear voltage regulator", Supplier Part Number 1=511-ST1L05APU33R, Supplier 1=Mouser
U3: "Crystal Oscillator for CODEC", Supplier Part Number 1=520-3225MV-240-BNT, Supplier 1=Mouser
U5: "Stereo CODEC WM8978 with Speaker Driver", Supplier Part Number 1=238-WM8978CGEFL/V, Supplier 1=Mouser
U6: library part STEP_DOWN_LM2576SX-5.0, "LM2576SX-5.0/NOPB step down voltage regulator", Supplier Part Number 1=926-LM2576SX-5.0NOPB, Supplier 1=Mouser
U8: library part VOLTAGE_TRANSLATOR_3.3-5V, "Translation - Voltage Levels DUAL-BIT DUAL SUPPLY TRANSCEIVER", Supplier Part Number 1=595-SN74LVC2T45DCTR, Supplier 1=Mouser

## Free pads (board coordinates)
  round 1.524 hole 2.5: ""(3,1) ""(3,35) ""(52,7) ""(52,49)

## Via types
v1: diameter 1, hole 0.3, Top Layer to Bottom Layer, 132 vias
v2: diameter 1.27, hole 0.711, Top Layer to Bottom Layer, 8 vias

## Nets (pads, with @x,y where several pads share a name; then routed paths per layer and width w, separated by ;. In a path a pad name is that pad's centre, name@x,y a point inside that pad or via, vN(x,y) a via of type N, cw(c..) or ccw(c..) an arc to the next point about the centre after c; other vN are vias at no path point)
3V3: BOOT.1 C1.2 C13.2 C14.2 C15.2 C16.2 C20.2 C21.2 J6.1 J10.1 R1.2 R2.2 R3.2 R4.1 R5.1 R8.1 R11.2 R20.3 R23.2 R24.2 U1.2 U2.2 U3.4 U5.13 U5.14 U5.26 U5.31 U8.8 | length 74.1
  Top Layer w0.5: v1(2.08,8.054) U1.2@2.08,9.03 ; J6.1@34.42,6.08 34.76,6.42 BOOT.1@34.76,10.87 ; U1.2@2.08,9.03 2.105,9.055 U1.2@2.08,9.08 U1.2@2.08,9.03
  Bottom Layer w0.2: R4.1@12.205,15.18 v1(14.81,15.18)
  Bottom Layer w0.4: v1(25.606,27.446) 26.499,26.553 26.499,25.41 27.534,24.376 C15.2@27.739,24.376 ; C16.2@27.685,22.8 27.685,24.2 27.835,24.35 28.335,23.85 ; U5.13@29.305,23.35 28.835,23.35 28.335,23.85 ; U5.14@29.305,23.85 28.335,23.85 ; U5.31@34.055,21.85 C13.2@35.855,21.85 35.855,21.978 36.63,22.753 36.63,23.92 C14.2@35.855,24.695 ; U5.26@34.055,24.35 35.455,24.35 C14.2@35.855,24.75
  Bottom Layer w0.5: v1(2.08,8.054) 2.08,6.714 2.16,6.634 C21.2@2.16,6.355 ; R2.2@2.16,4.465 C21.2@2.16,6.355 ; v1(4.937,12.064) 5.825,12.952 R11.2@5.825,13.53 ; R3.2@5.825,7.45 4.355,5.98 C21.2@2.535,5.98 C21.2@2.16,6.355 ; R4.1@11.855,15.235 12.15,15.23 13.509,15.204 v1(14.81,15.18) ; C1.2@14.05,35.495 v1(15.075,35.495) ; R1.2@14.055,40.36 14.055,41.305 v1(14.61,41.86) 14.61,39.805 15.51,38.905 15.51,37.66 15.47,37.62 U2.2@14.47,37.62 ; v1(18.32,23.58) 18.35,23.58 18.59,23.34 19.017,23.34 19.147,23.21 21.23,23.21 U3.4@21.36,23.34 ; R8.1@19.6,29.965 v1(19.6,31.13) ; J6.1@34.42,6.08 J6.1@34.767,5.733 ; C14.2@35.855,24.75 v1(35.855,26.791) 35.855,28.48 36.564,29.189 41.278,29.189 45.211,25.256 45.211,21.567 45.453,21.325 U8.8@46.63,21.325 ; U8.8@46.645,21.34 U8.8@46.66,21.325 ; v1(48.3,42.28) 49.505,42.28 49.545,42.24 R24.2@49.585,42.28 ; v1(48.937,38.65) 48.937,37.658 49.59,37.005 R23.2@49.545,36.96 R23.2@49.544,36.959
5V: C3.2 C6.2 D7.2 D8.4 D9.4 J2.13 L1.2 U2.3 U6.4 U8.1 | length 130.6
  Top Layer w0.4: 53.175,23.965 D9.4@53.175,25.15
  Top Layer w0.5: v1(28.52,42) 28.52,43.47 33.01,47.96 49.6,47.96 51.07,46.49 51.07,31.672 49.757,30.359 48.993,30.359 48.04,29.406 48.04,28.58 C6.2@46.03,26.57 ; C6.2@46.31,26.57 v1(47.68,25.2)
  Top Layer w1: U6.4@24.768,3.52 26.615,3.52 v1(26.675,3.46) ; L1.2@48.39,17.2 48.39,19.18 53.175,23.965
  Signal Layer 2 w1: v1(26.675,3.46) 26.675,5.605 32.83,11.76 46.308,11.76 49.44,14.892 49.44,21.076 49.37,21.146 49.37,21.89 v1(50.1,22.62)
  Bottom Layer w0.4: v1(47.68,25.2) 48.775,25.2 D8.4@48.825,25.15 48.825,23.895 v1(50.1,22.62) 50.53,22.19 U8.1@50.53,21.325
  Bottom Layer w0.5: U2.3@14.47,36.67 14.65,36.67 14.86,36.88 16.37,36.88 16.41,36.92 C3.2@16.41,37.605 16.41,38.87 17.573,40.033 17.573,40.745 18.838,42.01 18.848,42 24.38,42 24.38,41.94 25.12,41.2 ; J2.13@25.3,34.5 25.12,34.68 25.12,41.2 ; v1(28.52,42) 25.92,42 25.12,41.2
BOOT1: Q1.3 U1.25 | length 15.8
  Top Layer w0.2: v1(15.38,17.341) 15.38,23.592 15.754,23.967 16.763,23.967 17.378,24.581 17.378,25.262 17.19,25.45 U1.25@17.19,26.7
  Bottom Layer w0.2: v1(15.38,17.341) 15.38,16.856 16.156,16.08 19.42,16.08 Q1.3@19.47,16.03
BOOT2: Q2.3 U1.24 | length 19.4
  Top Layer w0.2: v1(16.71,15.31) 16.71,19.94 17.57,20.8 17.57,23.891 17.73,24.051 17.73,25.154 18.59,26.014 U1.24@18.59,26.7
  Signal Layer 1 w0.2: v1(16.71,15.31) 16.71,15.47 17.26,16.02 19.958,16.02 20.526,15.452 v1(21.15,15.452)
  Bottom Layer w0.2: v1(21.15,15.452) 21.728,16.03 Q2.3@23.1,16.03
CLK_24M: J7.1 U3.3 U5.11 | length 15.3
  Bottom Layer w0.2: U3.3@23.56,23.34 23.56,22.412 24.192,21.78 25.21,21.78 ; U5.11@29.305,22.35 28.569,22.35 28.344,22.125 26.152,22.125 25.807,21.78 25.21,21.78 ; J7.1@29.51,17.57 28.69,18.39 25.429,18.39 24.99,18.829 24.99,20.581 25.21,20.801 25.21,21.78
EXT_L2_P: C22.1 J13.1 R23.1 | length 36.6
  Signal Layer 1 w0.2: v1(39.06,27.79) 39.06,30.005 40.43,31.376 v1(40.43,36.583)
  Bottom Layer w0.2: C22.1@34.205,18.23 37.165,18.23 38.595,19.66 38.595,25.954 38.58,25.969 38.58,26.591 38.595,26.606 38.595,27.325 v1(39.06,27.79) ; v1(40.43,36.583) 41.233,36.583 42.15,37.5 46.613,37.5 47.863,36.25 50.585,36.25 R23.1@51.295,36.96 52.91,36.96 J13.1@53.07,37.12
EXT_R2_P: C23.1 J12.1 R24.1 | length 45.4
  Top Layer w0.2: v1(39.58,24.81) 39.58,24.86 40.08,25.36 40.08,28.525 39.565,29.04 39.565,35.262 39.31,35.517 39.31,38.285 39.565,38.539 39.565,42.965 v1(40.02,43.42)
  Bottom Layer w0.2: C23.1@34.155,16.911 36.595,16.911 39.58,19.896 v1(39.58,24.81) ; v1(40.02,43.42) 40.175,43.575 50.96,43.575 51.335,43.2 R24.1@51.335,42.28 52.91,42.28 J12.1@53.15,42.52
GND: C1.1 C2.1 C3.1 C4.1 C5.1 C6.1 C9.1 C11.1 C13.1 C14.1 C15.1 C16.1 C17.2 C18.2 C19.1 C20.1 C21.1 C24.1 C26.1 D1.2 D5.1 D6.1 D8.3 D9.3 J1.4 J2.14 J3.3 J6.2 J11.2 J12.2 J13.2 MIC1.1 MIC1.2 MIC1.5 MIC2.1 MIC2.2 MIC2.5 nRESET.1 Q1.2 Q2.2 Q3.2 Q4.2 Q5.2 Q6.2 Q7.2 Q8.2 Q9.2 Q11.2 R6.1 R9.1 R10.1 R12.1 R13.1 R14.1 R16.1 R17.1 R18.1 R19.1 R20.1 R22.1 SW2.3 U1.1 U1.15 U1.38 U1.39 U2.6 U2.7 U3.2 U5.12 U5.24 U5.28 U5.33 U6.3 U6.5 U6.6 U8.4 U8.5 | length 19.5
  Top Layer w0.2: U1.39@8.6,16.51 8.56,16.55 8.765,16.755 v1(9.415,16.755) ; C5.1@28.96,5.22 29.4,5.22 C5.1@29.45,5.27 ; v2(32.58,24) v2@32.71,24.13 ; v1(42.787,33.58) C19.1@43.615,33.58
  Signal Layer 1 w0.2: J2.14@37.92,34.42 J2.14@38,34.5
  Bottom Layer w0.2: C9.1@0.905,13.53 C9.1@0.985,13.45 ; C21.1@0.985,5.98 C20.1@0.985,7.37 ; Q3.2@3.18,21.78 4.965,23.565 C26.1@4.965,24.245 5.025,24.185 R12.1@6.18,24.185 ; C1.1@14.05,33.819 C1.1@14.05,33.945 ; Q6.2@14.25,21.78 Q6.2@14.306,21.836 ; Q2.2@22.15,14.33 Q2.2@22.15,14.7 ; U5.12@29.305,22.85 30.13,22.85 v2(30.78,22.2) ; U5.33@31.68,23.1 31.93,23.35 U5.28@34.055,23.35 ; v2(32.58,24) 33.38,24.8 33.38,25.113 33.43,25.162 U5.24@33.43,25.475 ; C18.2@37.405,20.46 C13.1@37.405,21.85 C17.2@37.405,23.35 C14.1@37.405,24.75 ; R22.1@40.795,5.82 R22.1@40.82,5.795
  other v2: 32.58,22.2 30.78,24 51,25.25 51,27 51,28.75 12.945,37.62
I2C_SCL: R4.2 U1.10 U5.16 | length 33.8
  Top Layer w0.2: v1(12.22,10.02) 12.24,10 U1.10@12.24,9.08 ; v1(22.89,17.61) 22.89,19.967 23.072,20.149 23.072,20.771 22.89,20.953 22.89,23.68 23.45,24.24 23.45,24.26 26.87,24.26 27.73,25.12 v1(27.73,25.63)
  Signal Layer 1 w0.2: v1(19.599,13.33) 22.24,13.33 22.89,13.98 v1(22.89,17.61)
  Bottom Layer w0.2: v1(12.22,10.02) 12.22,13.415 R4.2@12.15,13.485 12.27,13.605 12.27,13.7 12.73,14.16 14.064,14.16 14.084,14.14 15.92,14.14 16.419,13.641 17.85,13.641 18.162,13.33 v1(19.599,13.33) ; v1(27.73,25.63) 28.159,25.63 28.589,25.2 28.955,25.2 U5.16@29.305,24.85
I2C_SDA: R5.2 U1.11 U5.17 | length 52.8
  Top Layer w0.2: U1.11@13.38,9.08 13.38,8.11 13.56,7.93 v1(13.56,7.02)
  Signal Layer 1 w0.2: v1(14.781,13.33) 14.781,13.353 15.364,13.937 18.043,13.937 18.41,13.57 18.41,10.51 19.1,9.82 28.502,9.82 33.748,15.066 33.748,25.687 v1(31.02,28.416)
  Bottom Layer w0.2: v1(13.56,7.02) 13.51,7.07 R5.2@13.51,13.485 13.665,13.33 v1(14.781,13.33) ; U5.17@29.93,25.475 29.93,25.951 30.504,26.525 30.614,26.525 30.76,26.671 30.76,26.687 31.02,26.947 v1(31.02,28.416)
I2S_BCK: U1.6 U5.8 | length 32.6
  Top Layer w0.2: U1.6@7.03,9.08 7.03,10.28 7.708,10.958 9.082,10.958 9.434,11.31 11.991,11.31 12.276,11.025 13.939,11.025 14.114,10.85 14.399,10.85 15.251,10.85 15.359,10.958 19.458,10.958 v1(19.63,11.13) ; v1(24.6,18.06) 26.86,18.06 27.72,18.92 v1(27.72,19.47)
  Signal Layer 1 w0.2: v1(19.63,11.13) 23.37,11.13 23.49,11.25 23.49,16.95 v1(24.6,18.06)
  Bottom Layer w0.2: v1(27.72,19.47) 27.72,19.729 28.716,20.725 U5.8@29.93,20.725
I2S_IN: U1.5 U5.9 | length 37.3
  Top Layer w0.2: v1(3.565,17.49) 5.55,19.475 v1(11.145,19.475) ; v1(5.81,10.15) 5.89,10.07 U1.5@5.89,9.08
  Signal Layer 1 w0.2: v1(3.565,17.49) 3.63,17.425 3.63,12.31 5.79,10.15 v1(5.81,10.15) ; v1(11.145,19.475) 11.212,19.542 21.19,19.542 21.372,19.36 21.722,19.01 22.923,19.01 23.273,19.36 24.954,19.36 25.174,19.14 v1(25.74,19.14)
  Bottom Layer w0.2: v1(25.74,19.14) 26.97,20.37 27.701,20.37 28.681,21.35 U5.9@29.305,21.35
I2S_OUT: U1.8 U5.10 | length 33.1
  Top Layer w0.2: U1.8@9.7,9.08 9.745,9.125 v1(9.745,10.56) ; v1(10.67,13.6) 12.406,15.336 12.406,20.114 11.614,20.906 v1(11.407,20.906)
  Signal Layer 1 w0.2: v1(9.745,10.56) 9.745,12.585 9.7,12.63 v1(10.67,13.6) ; v1(11.407,20.906) 12.5,20.906 13.366,20.04 21.187,20.04 21.867,19.36 22.778,19.36 23.76,20.342 26.434,20.342 v1(27.447,21.355)
  Bottom Layer w0.2: v1(27.447,21.355) 27.867,21.775 29.23,21.775 U5.10@29.305,21.85
I2S_WS: U1.7 U5.7 | length 31.4
  Top Layer w0.2: U1.7@8.43,9.08 v1(8.43,10.208)
  Signal Layer 1 w0.2: v1(8.43,10.208) 8.43,10.552 8.91,11.032 8.91,13.832 11.095,16.017 11.095,17.532 12.573,19.01 21.227,19.01 21.577,18.66 23.068,18.66 23.418,19.01 24.809,19.01 25.429,18.39 27.88,18.39 v1(29.28,19.79)
  Bottom Layer w0.2: v1(29.28,19.79) 30.07,19.79 30.43,20.15 U5.7@30.43,20.725
L1_N: C8.1 U5.2 | length 56.4
  Top Layer w0.2: v1(9.155,33.255) 9.155,35.07 10.055,35.97 13.825,35.97 14.485,36.63 16.905,36.63 17.565,35.97 v1(22.11,35.97) ; v1@25.04,22.91 23.83,21.7 23.83,17.61 24.13,17.31 24.911,17.31 26.95,17.31 27.72,16.54 27.69,16.51 v1(27.69,14.57)
  Bottom Layer w0.2: C8.1@9.155,31.51 v1(9.155,33.255) ; v1(22.11,35.97) 22.11,33.5 21.47,32.86 v1(21.47,29.512) 21.47,28.827 22.697,27.6 23.805,27.6 25,26.405 v1(25,22.91) ; v1(27.69,14.57) 32.37,14.57 33.33,15.53 33.33,18.969 32.93,19.369 U5.2@32.93,20.725